# Altium PCB AT_Link_V1.4.PcbDoc
Units mil, origin at the board's own origin, x right, y up, seen from the top; angles counter-clockwise.
Board outline 2362.2 x 885.83 mil, 2 copper layers (Top Layer, Bottom Layer); 56 components, 66 nets, 234 pads, 83 vias.
Unrouted connection lines stored in the file: 35.
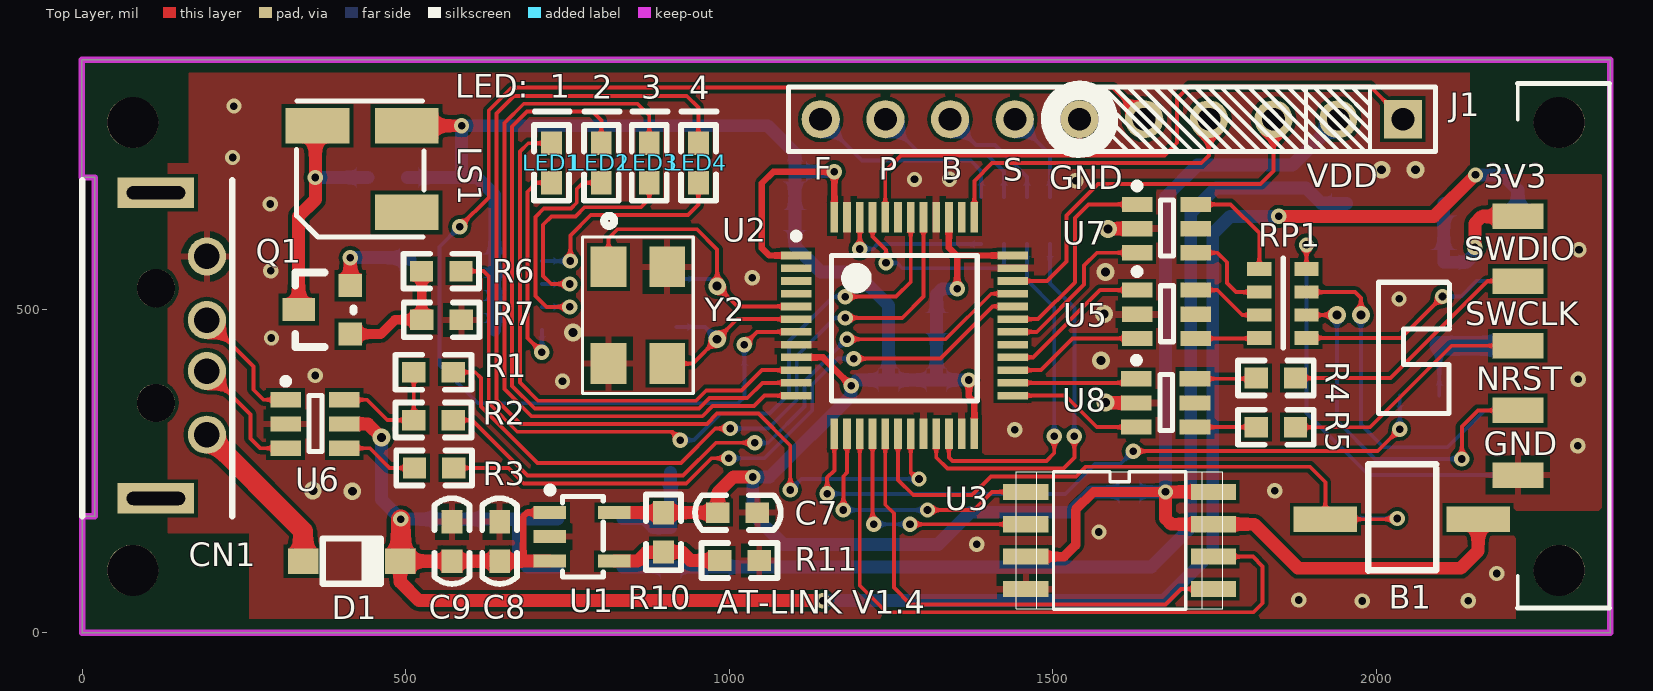
[diagram p0: Top Layer view]
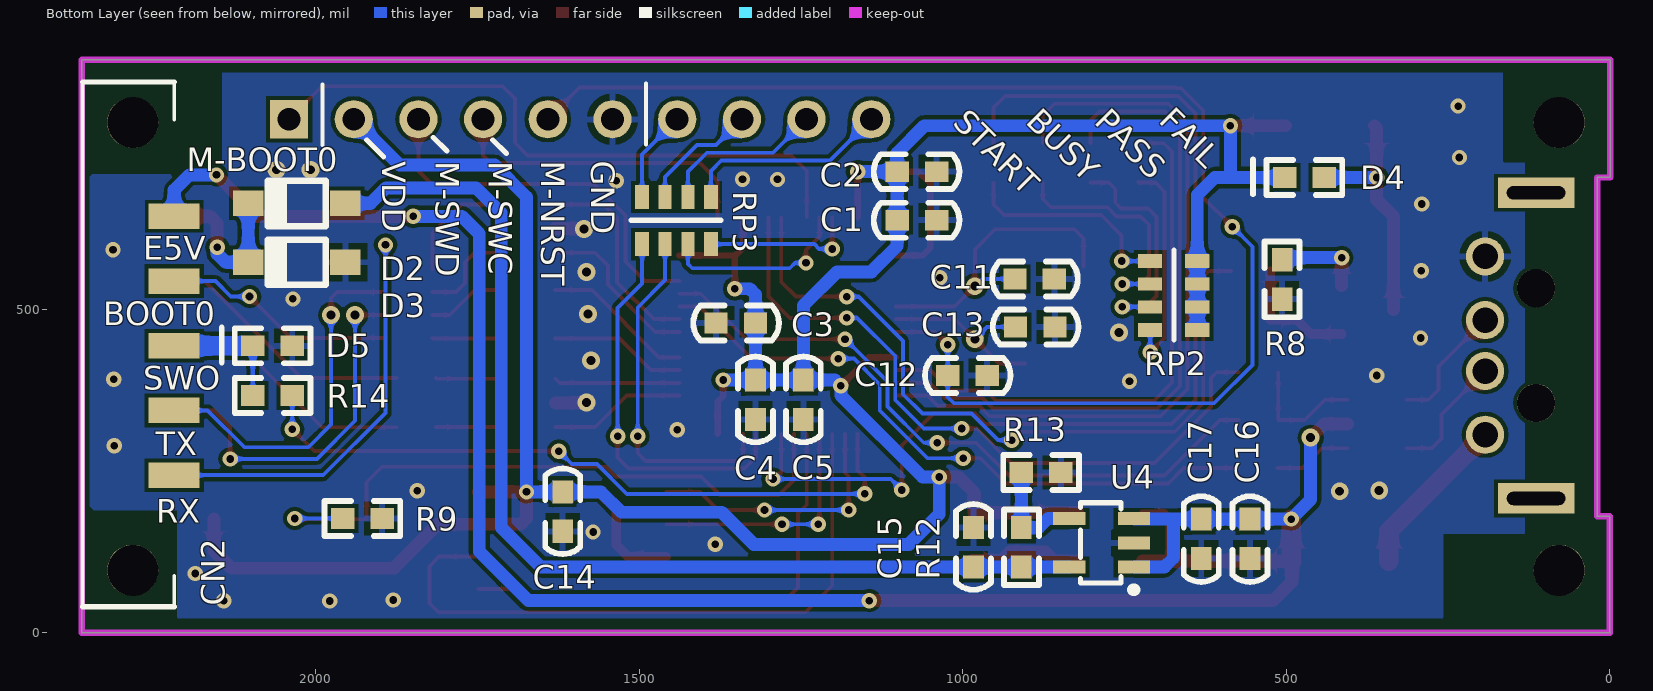
[diagram p1: Bottom Layer view, seen from below]

## Layer stack, top to bottom
Top Solder: solder mask 0.4, Solder Resist, Dk 3.5
Top Layer: signal copper 1.4
Dielectric1: dielectric 12.6, FR-4, Dk 4.8
Bottom Layer: signal copper 1.4
Bottom Solder: solder mask 0.4, Solder Resist, Dk 3.5

## Board outline
-0.32,703.68 -0.32,885.51 2361.89,885.51 2361.89,-0.31 -0.32,-0.31 0,0 0,180 19.37,180 19.37,703.68

## Design rules (kind name [scope] priority, off if disabled: settings)
Clearance [All] p1: gap=6 ignorepadtopadclearanceinfootprint=TRUE except(0: Arc-Hole Track-Hole SMDPad-Hole THPad-Hole Via-Hole Fill-Hole Poly-Hole Region-Hole Text-Hole)
PolygonConnect PolygonConnect_1 [IsVia] p1: connectstyle=Direct reliefconductorwidth=10 reliefentries=4 polygonreliefangle="90 Angle" airgapwidth=10
PolygonConnect [All] p2: connectstyle=Relief reliefconductorwidth=10 reliefentries=4 polygonreliefangle="90 Angle" airgapwidth=10
RoutingVias [All] p1: holewidth=28 width=50 viastyle="Through Hole" minholewidth=28 minwidth=50 maxholewidth=28 maxwidth=50
SolderMaskExpansion [All] p1: expansion=4
Width [All] p1: maxlimit=100 minlimit=6 preferedwidth=6
30 further rules are at their usual default settings.

## Components (designator, comment, footprint, x,y, rotation, side; value= is the part's Value field where it differs from the comment)
B1 "PB,Blue,SMD_2P" KEY_3*6*2.5 2157.89,175.51 r180 top locked
C1 "4.7uF" C0603 1040.72,637.89 r0 bottom value=4.7uf
C2 "0.1uF" C0603 1040.72,712.89 r0 bottom value=0.1uf
C3 "0.1uF" C0603 1381.65,478.48 r180 bottom value=0.1uf
C4 "0.1uF" C0603 1320.48,329.72 r90 bottom value=0.1uf
C5 "0.1uF" C0603 1246.48,329.72 r90 bottom value=0.1uf
C7 "10uF" C0603 982.72,185.48 r0 top
C8 "10uF" C0603 645.69,110.69 r90 top
C9 "0.1uF" C0603 571.89,110.72 r90 top
C11 "22pF/16V" C0603 919.69,546.68 r180 bottom
C12 "0.1uF/16V" C0603 1023.65,397.48 r180 bottom
C13 "22pF/16V" C0603 918.65,472.48 r180 bottom
C14 "0.1uF/16V" C0603 1618.48,156.72 r90 bottom value=0.1uf
C15 "10uF" C0603 983.48,101.72 r90 bottom
C16 "10uF" C0603 556.69,175.69 r270 bottom
C17 "0.1uF" C0603 631.89,175.69 r270 bottom
CN1 "USB-A 90°弯针" "USB_A - DIP" 192.89,581.67 r270 top
CN2 "CON1" SWD_2*5P_SMT 2219.15,443.6 r270 bottom locked
D1 "DFLS130L" SOD-123 416.68,110.69 r180 top
D2 "DFLS130L" SOD-123 2029.69,663.68 r180 bottom
D3 "SMF3.3A" SOD-123 2029.69,572.68 r180 bottom
D4 "1N5819" LED0603 441.72,703.89 r0 bottom
D5 "ESD3.3V52D" SOD523 2036.72,443.8 r0 bottom
J1 "Header 10" HDR1X10 2041.69,793.68 r180 top
LED1 "RED" LED0603 725.89,695.72 r90 top
LED2 "GREEN" LED0603 802.86,695.72 r90 top
LED3 "BLUE" LED0603 876.89,695.67 r90 top
LED4 "YELLOW" LED0603 952.89,695.67 r90 top
LS1 "MLT-5030贴片无源蜂鸣器" "BUZZER - 5030" 501.69,783.68 r90 top
Q1 "S8050" SOT-23 414.83,461.57 r90 top
R1 "NC" R0603 573.65,402.89 r180 top
R2 "22R" R0603 512.72,328.48 r0 top
R3 "22R" R0603 513.72,254.48 r0 top
R4 "100R" R0603 1875.65,393.89 r180 top
R5 "100R" R0603 1875.65,317.89 r180 top
R6 "470R" R0603 524.69,558.68 r0 top
R7 "100K" R0603 586.17,483.89 r180 top
R8 "22R" R0603 506.48,515.72 r90 bottom
R9 "100K" R0603 1897.72,176.89 r0 bottom
R10 "47K" R0603 898.89,124.72 r90 top
R11 "15K" R0603 1046.65,111.89 r180 top
R12 "51K" R0603 909.89,162.65 r270 bottom
R13 "15K" R0603 848.72,247.89 r0 bottom
R14 "100R" R0603 2097.65,366.48 r180 bottom
RP1 "100R" RP_4-0603 1819.69,561.98 r0 top
RP2 "1K" RP_4-0603 710.69,574.55 r180 bottom
RP3 "100R" RP_4-0603 1495.98,600.68 r90 bottom
U1 "RT9080N-08GJ5" SOT-23-5 787.69,85.69 r0 top
U2 "AT32F403CGT6" "LQFP48 - 2" 1103.69,583.13 r0 top locked
U3 "W25Q128" SOIC8_208 1603.69,142.69 r270 top
U4 "RT9080N-08GJ5" SOT-23-5 800.69,201.69 r0 bottom
U5 "USBLC6-2SC6" "SOT23_6P - L" 1630.69,529.68 r0 top
U6 "USBLC6-2SC6" "SOT23_6P - L" 314.68,360.09 r0 top
U7 "USBLC6-2SC6" "SOT23_6P - L" 1630.69,662.09 r0 top
U8 "USBLC6-2SC6" "SOT23_6P - L" 1629.69,392.69 r0 top
Y2 "8MHz" XTAL_5032 813.69,565.68 r270 top

## Footprints (in the part's own frame and the unit in brackets; to place one, negate y for a bottom-side part, rotate by r counter-clockwise, add the part's x,y. Pads: shape width x height; smd on the part's side, far side on the other; paste and mask are expansions set on the pad)
"BUZZER - 5030" [mm]
  rect 1.4x2.5 smd: 1(0,0) 2(0,3.5) 3(-3.4,0)
  silkscreen extent -4.37,-0.69 0.97,4.32
C0603 [mil]
  rect 36x32 smd: 1(-0.04,0.2) 2(60.96,0.2)
  silkscreen extent -35,-27 97,27
HDR1X10 [mm] "Connector; Header; 10 Position"
  rect 1.5x1.5 hole 0.9: 1(0,0)
  round 1.5 hole 0.9: 2(2.54,0) 3(5.08,0) 4(7.62,0) 5(10.16,0) 6(12.7,0) 7(15.24,0) 8(17.78,0) 9(20.32,0) 10(22.86,0)
  silkscreen extent -1.27,-1.27 24.13,1.27
KEY_3*6*2.5 [mm]
  rect 2.5x1 smd: 1(0,0) 2(6,0)
  silkscreen extent 1.65,-2.16 4.32,2.03
LED0603 [mil]
  rect 36x32 smd: 1(-0.04,0.2) 2(60.96,0.2)
  silkscreen extent -28,-28 110,27
"LQFP48 - 2" [mm] "DPIN-0.5"
  rect 1.2x0.3 smd: 1(0,0) 2(0,-0.5) 3(0,-1) 4(0,-1.5) 5(0,-2) 6(0,-2.5) 7(0,-3) 8(0,-3.5) 9(0,-4) 10(0,-4.5) 11(0,-5) 12(0,-5.5) 25(8.5,-5.5) 26(8.5,-5) 27(8.5,-4.5) 28(8.5,-4) 29(8.5,-3.5) 30(8.5,-3) 31(8.5,-2.5) 32(8.5,-2) 33(8.5,-1.5) 34(8.5,-1) 35(8.5,-0.5) 36(8.5,0)
  rect 0.3x1.2 smd: 13(1.5,-7) 14(2,-7) 15(2.5,-7) 16(3,-7) 17(3.5,-7) 18(4,-7) 19(4.5,-7) 20(5,-7) 21(5.5,-7) 22(6,-7) 23(6.5,-7) 24(7,-7) 37(7,1.5) 38(6.5,1.5) 39(6,1.5) 40(5.5,1.5) 41(5,1.5) 42(4.5,1.5) 43(4,1.5) 44(3.5,1.5) 45(3,1.5) 46(2.5,1.5) 47(2,1.5) 48(1.5,1.5)
  silkscreen extent -0.12,-5.71 7.11,0.89
R0603 [mil]
  rect 36x32 smd: 1(-0.04,0.2) 2(60.96,0.2)
  silkscreen extent -28,-27 89,27
RP_4-0603 [mm]
  rect 0.95x0.55 smd: 1(0,0) 4(0,-2.7) 5(1.85,-2.7) 8(1.85,0)
  rect 0.95x0.5 smd: 2(0,-0.9) 3(0,-1.8) 6(1.85,-1.8) 7(1.85,-0.9)
  silkscreen extent 0.94,-3.1 0.94,0.43
SOD523 [mil]
  rect 36x32 smd: 1(-0.04,0.2) 2(60.96,0.2)
  silkscreen extent -28,-28 109,27
SOD-123 [mm]
  rect 1.2x1 smd: 1(1.905,0) 2(-1.905,0)
  silkscreen extent -1.14,-0.89 1.14,0.89
SOIC8_208 [mil]
  rect 25x70 smd mask+2: 1(-75,-145) 2(-25,-145) 3(25,-145) 4(75,-145) 5(75,145) 6(25,145) 7(-25,145) 8(-75,145)
  silkscreen extent -106,-159 106,159
"SOT23_6P - L" [mm]
  rect 1.2x0.6 smd: 1(0,0) 2(0,-0.95) 3(0,-1.9) 4(2.3,-1.9) 5(2.3,-0.95) 6(2.3,0)
  silkscreen extent -0.12,-2.03 1.42,0.85
SOT-23 [mil]
  rect 36x36 smd: 1(0.11,0.15) 2(75.11,0.15)
  rect 36x50 smd: 3(38.11,80.15)
  silkscreen extent -20,-5 95,85
SOT-23-5 [mil]
  rect 50x20 smd: 1(-65,100) 2(-65,63) 3(-65,25) 4(35,25) 5(35,100)
  silkscreen extent -65,1 18,135
SWD_2*5P_SMT [mm]
  rect 1x2 smd: 1(-5.08,0) 3(-2.54,0) 5(0,0) 7(2.54,0) 9(5.08,0)
  rect 1x2 smd far side: 2(-5.08,0) 4(-2.54,0) 6(0,0) 8(2.54,0) 10(5.08,0)
  silkscreen extent -10.35,-3.6 10.25,0
"USB_A - DIP" [mm]
  round 1.5 hole 1: 1(7,0) 2(4.5,0) 3(2.5,0) 4(0,0)
  rect 1.2x3 hole 0.52 slot 2.3 at 90 deg: 5(-2.5,-2) 6(9.5,-2)
  round 1.5 hole 1.5: 7(1.25,-2) 8(5.75,-2)
  silkscreen extent -3,-4.9 10.2,1
XTAL_5032 [mm]
  rect 1.6x1.4 smd: 1(0,0) 2(3.8,0) 3(3.8,2.3) 4(0,2.3)
  silkscreen extent -2,-1.02 4.98,3.33

## Part data
B1: library part Push_Bottom,Blue,SMD_2P, "3*6*5"
C1 C2 C3 C4 C5 C14: library part "Cap Semi", "Capacitor (Semiconductor SIM Model)", LatestRevisionDate=29-May-2009, LatestRevisionNote="IPC-7351 Footprint Added.", PackageDescription="Chip Capacitor", PackageReference=C1206, Published=8-Jun-2000, Publisher="Altium Limited"
C7 C8 C9 C12 C15 C16 C17: library part 0.1uF,50V,20%,SMD0603
C11 C13: library part 10pF,50V,5%,SMD0603
CN1: library part "Header 4", "Header, 4-Pin", LatestRevisionDate=17-Jul-2002, LatestRevisionNote="Re-released for DXP Platform.", Publisher="Altium Limited"
CN2: library part CON10A_0
D1 D2 D3 D4 D5: library part Diode, "Default Diode", Code_JEDEC=DO-214-AB, LatestRevisionDate=17-Jul-2002, LatestRevisionNote="Re-released for DXP Platform.", PackageDescription="DO-214-AB/SMC; 2 C-Bend Leads; Body 7.9 x 5.9 mm, inc. leads (LxW)", PackageReference=SMC, PackageVersion=Sep-1996, Published=8-Jun-2000, Publisher="Altium Limited"
J1: "Header, 10-Pin", LatestRevisionDate=17-Jul-2002, LatestRevisionNote="Re-released for DXP Platform.", Publisher="Altium Limited"
LED1: library part RED,SMD0603
LED2: library part GREEN,SMD0603
LED3: library part BLUE,SMD0603, "贴片LED 蓝色 0603"
LED4: library part YELLOW,SMD0603
LS1: library part Bell, "Electrical Bell", LatestRevisionDate=17-Jul-2002, LatestRevisionNote="Re-released for DXP Platform.", PackageReference=PIN2, Published=24-Mar-1999, Publisher="Altium Limited"
Q1: library part NPN
R1: library part 10K,1/10W,1%,SMD0603_Dup1
R2 R3 R4 R5 R14: library part 22,1/10W,1%,SMD0603
R6 R7 R8 R10 R11 R12 R13: library part 470,1/10W,1%,SMD0603
R9: library part 10K,1/10W,1%,SMD0603
RP1 RP2 RP3: library part 22,1/16W,5%,8P4R
U1 U4: library part RT9080N
U2: library part LQFP48&QFN48
U3: library part W25Q128FVSIQ,SOIC8_1
Y2: library part "SMD-5032_4P  8MHZ 20PF 10PPM", "贴片晶振", Package=SMD-3225_4P, SuppliersPartNumber=C9002, ComponentLink1Description=¹©Ó, ComponentLink1URL=http://www.szlcsc.com/product/details_9522.html, Supplier=LC

## Free pads (board coordinates)
  round 78.74 hole 78.74: 0(78.43,96.54) 0(78.43,788.66) 0(2283.15,96.54) 0(2283.15,788.66)

## Via types
v1: diameter 23.62, hole 11.81, Top Layer to Bottom Layer, tented both sides, 68 vias
v2: diameter 27.56, hole 13.78, Top Layer to Bottom Layer, tented both sides, 15 vias

## Nets (pads, with @x,y where several pads share a name; then routed paths per layer and width w, separated by ;. In a path a pad name is that pad's centre, name@x,y a point inside that pad or via, vN(x,y) a via of type N, cw(c..) or ccw(c..) an arc to the next point about the centre after c; other vN are vias at no path point)
A-ATLK_SWO: R14.2 U2.13 | length 1075.9
  Top Layer w6: v1(1151.69,214.69) 1151.69,239.69 1162.74,250.74 U2.13 ; v1(1624.69,280.69) 2002.69,280.69 v1(2036.69,314.69)
  Bottom Layer w6: v1(1151.69,214.69) 1519.69,214.69 1565.69,260.69 1604.69,260.69 v1(1624.69,280.69) ; v1(2036.69,314.69) R14.2
ATLK_BOOT0: U2.27 U5.3 | length 212.6
  Top Layer w6: U2.27 1481.97,405.97 1530.88,454.88 U5.3
ATLK_NRST: U2.28 U5.1 | length 235.4
  Top Layer w6: U2.28 1469.65,425.65 1573.69,529.68 U5.1
ATLK_RX: U2.31 U7.1 | length 324.1
  Top Layer w6: U2.31 1477.71,484.71 1534.69,541.68 1534.69,641.2 1555.57,662.09 U7.1
ATLK_SWCLK: U2.25 U8.3 | length 211.5
  Top Layer w6: U2.25 1519.69,366.6 1568.4,317.88 U8.3
ATLK_SWDIO: U2.26 U8.1 | length 194
  Top Layer w6: U2.26 1623.28,386.28 U8.1
ATLK_TX: U2.30 U7.3 | length 260.3
  Top Layer w6: U2.30 1475.57,465.02 1548.69,538.13 1548.69,567.61 1568.36,587.28 U7.3
BOOT0: J1.1 U2.44 | length 987
  Top Layer w6: U2.44 1241.48,713.48 1265.88,737.88 1673.19,737.88 1692.69,757.38 1692.69,825.68 1711.69,844.68 1990.69,844.68 J1.1
BUSY: J1.8 RP3.7 | length 186.9
  Bottom Layer w6: J1.8 1381.48,753.89 1411.34,753.89 1460.55,704.68 RP3.7
BUZZ: R6.2 U2.42 | length 1167.4
  Top Layer w6: R6.2 620.48,558.89 628.69,550.68 628.69,354.71 672.71,310.69 911.69,310.69 v1(924.69,297.69) ; v1(1179.69,519.54) 1258.09,519.54 1280.85,542.3 U2.42
  Bottom Layer w6: v1(924.69,297.69) 945.69,297.69 986.69,338.69 1062.69,338.69 1092.69,368.69 1092.69,450.69 1161.54,519.54 v1(1179.69,519.54)
DM: CN1.2 U6.3 | length 192.9
  Top Layer w6: CN1.2 260.18,337.21 260.18,300.19 275.09,285.28 U6.3
DP: CN1.3 U6.1 | length 193.8
  Top Layer w6: CN1.3 264.68,411.45 264.68,375.69 280.28,360.09 U6.1
E5V: C8.1 C9.1 C16.1 C17.1 CN2.1 D1.2 U1.1 U1.3 U4.1 U4.3 U6.5 | length 3365.7
  Top Layer w10: 681.69,110.69 681.69,179.69 687.69,185.69 U1.1
  Top Layer w20: U6.5 441.68,322.69 v2(462.68,301.69) ; U1.3 681.69,110.69 C9.1 D1.2 491.69,78.69 520.69,49.69 v1(1144.69,49.69) ; v1(1849.7,643.67) 2089.67,643.67 v1(2153.69,707.68)
  Top Layer w30: D1.2 492.69,111.69 v1(492.69,175.69)
  Bottom Layer w20: v2(462.68,301.69) 462.68,205.69 v1(492.69,175.69) 631.65,175.69 C17.1 674.69,175.72 ; U4.1 688.69,101.69 674.69,115.69 674.69,175.72 ; U4.3 734.72,175.72 674.69,175.72 ; v1(1144.69,49.69) 1671.69,49.69 1747.69,125.69 1747.69,616.68 1774.67,643.67 v1(1849.7,643.67) ; v1(2153.69,707.68) 2195.69,707.68 2219.15,684.22 CN2.1
FAIL: J1.10 RP3.5 | length 321.4
  Bottom Layer w6: J1.10 1205.48,729.89 1373.69,729.89 1389.69,713.89 RP3.5
FLASH_CS: U2.14 U3.1 | length 413.8
  Top Layer w6: v1(1176.69,189.69) 1176.69,241.94 1182.43,247.69 U2.14 ; v1(1306.69,189.69) 1378.69,189.69 1406.69,217.69 U3.1
  Bottom Layer w6: v1(1176.69,189.69) v1(1306.69,189.69)
GND: C1.1 C2.1 C3.1 C4.1 C5.1 C7.2 C8.2 C9.2 C11.2 C12.2 C13.2 C14.1 C15.2 C16.2 C17.2 CN1.4 CN2.10 D3.1 D5.1 J1.6 R7.1 R8.1 R9.1 R11.1 R13.1 U1.2 U2.8 U2.20 U2.23 U2.35 U2.40 U2.47 U3.4 U4.2 U5.2 U6.2 U7.2 U8.2 Y2.2 Y2.4 | length 93.3
  Top Layer w20: v2(1581.69,355.69) 1582.09,355.28 U8.2 ; v2(1585.69,624.33) 1586.04,624.68 U7.2
  other v1: 1978.69,49.19 2142.69,49.69 1880.69,50.69 2186.69,91.69 1382.69,136.69 1571.69,155.69 1843.69,219.69 2311.69,289.07 1441.69,313.69 742.69,388.69 2312.69,391.69 360.5,397.69 292.68,455.69 2035.69,516.02 1035.69,548.84 291.68,559.38 2313.69,591.99 290.68,662.68 1535.74,698.84 1286.69,700.73 1340.69,700.88 232.68,734.68 234.68,814.06
  other v2: 417.68,218.69 356.68,219.69 1574.69,420.84 758.69,463.99 1579.69,492.61 1581.69,557.8 2008.69,715.68 2060.86,715.68
KEY1: B1.2 R9.2 U2.18 | length 1012.4
  Top Layer w6: U2.18 1261.17,236.26 1284.74,212.69 1375.69,212.69 1404.69,241.69 1536.69,241.69 1551.69,256.69 1897.67,256.69 1921.67,232.69 B1.2 2031.51,175.51 v1(2032.69,176.69)
  Bottom Layer w6: R9.2 v1(2032.69,176.69)
LED1: LED1.2 U2.10 | length 869.6
  Top Layer w6: LED1.2 689.69,756.68 676.69,743.68 676.69,386.63 704.63,358.69 948.74,358.69 964.74,374.69 1019.4,374.69 1050.69,405.97 U2.10
LED2: LED2.2 U2.11 | length 1059.2
  Top Layer w6: LED2.2 802.66,791.71 788.69,805.68 687.66,805.68 664.69,782.71 664.69,381.66 699.66,346.69 953.71,346.69 969.71,362.69 1028.09,362.69 1051.69,386.28 U2.11
LED3: LED3.2 U2.12 | length 1179.6
  Top Layer w6: LED3.2 876.69,799.68 858.69,817.68 682.69,817.68 652.69,787.68 652.69,376.69 694.69,334.69 958.69,334.69 974.69,350.69 1038.77,350.69 1054.69,366.6 U2.12
LED4: LED4.2 U2.19 | length 1676.8
  Top Layer w6: LED4.2 952.69,811.68 934.69,829.68 667.69,829.68 640.69,802.68 640.69,359.69 677.69,322.69 965.69,322.69 981.69,338.69 1045.69,338.69 1094.69,289.69 v1(1094.69,220.69) ; U2.19 1280.85,247.78 1290.94,237.69 v1(1293.69,237.69)
  Bottom Layer w6: v1(1094.69,220.69) 1111.69,237.69 v1(1293.69,237.69)
NetC11_1: C11.1 U2.5 Y2.1 | length 489.2
  Top Layer w6: Y2.1 813.69,609.68 827.69,623.68 950.69,623.68 981.69,592.68 v2(981.69,535.68) 1012.98,504.39 U2.5
  Bottom Layer w6: C11.1 970.48,546.89 v2(981.69,535.68)
NetC13_1: C13.1 U2.6 Y2.3 | length 298.7
  Top Layer w6: Y2.3 944.08,416.08 v2(981.69,453.69) 1012.71,484.71 U2.6
  Bottom Layer w6: C13.1 962.69,472.69 v2(981.69,453.69)
NetD4_1: D4.1 LS1.2 Q1.3 | length 377.3
  Top Layer w20: Q1.3 334.68,643.68 360.5,669.5 v1(360.5,703.68) 360.5,780.29 LS1.2
  Bottom Layer w20: v1(360.5,703.68) D4.1
NetLED1_1: LED1.1 RP2.4 | length 337.2
  Top Layer w6: v1(710.69,433.69) 688.69,455.69 688.69,681.68 702.69,695.68 LED1.1 ; LED1.1@726.69,694.68 LED1.1@728.63,696.63
  Bottom Layer w6: v1(710.69,433.69) RP2.4
NetLED2_1: LED2.1 RP2.3 | length 361.3
  Top Layer w6: v1(753.69,503.69) 717.69,503.69 700.69,520.68 700.69,642.77 713.6,655.68 755.69,655.68 764.69,664.68 764.69,685.68 774.69,695.68 LED2.1
  Bottom Layer w6: RP2.3 v1(753.69,503.69)
NetLED3_1: LED3.1 RP2.2 | length 373.7
  Top Layer w6: v1(753.69,539.12) 725.25,539.12 712.69,551.68 712.69,630.68 725.69,643.68 762.69,643.68 776.69,657.68 863.69,657.68 876.69,670.68 LED3.1
  Bottom Layer w6: RP2.2 v1(753.69,539.12)
NetLED4_1: LED4.1 RP2.1 | length 335.3
  Top Layer w6: v1(754.69,574.55) 754.69,614.19 786.18,645.68 936.69,645.68 952.69,661.68 LED4.1
  Bottom Layer w6: RP2.1 v1(754.69,574.55)
NetQ1_1: Q1.1 R6.1 R7.2 | length 195.1
  Top Layer w15: Q1.1 461.68,461.69 483.69,483.69 R7.2 525.21,558.32 R6.1
NetQ1_2: Q1.2 R8.2 | length 136.4
  Top Layer w20: Q1.2 v1(414.68,579.82)
  Bottom Layer w20: v1(414.68,579.82) 503.55,579.82 R8.2
NetR1_2: R1.2 R2.1 U6.6 | length 194.5
  Top Layer w6: U6.6 440.28,360.09 471.68,328.69 R2.1 R1.2
NetR3_1: R3.1 U6.4 | length 121.1
  Top Layer w6: U6.4 444.61,285.28 475.2,254.69 R3.1
NetR4_2: R4.2 U8.6 | length 94.9
  Top Layer w6: U8.6 1813.69,392.69 R4.2
NetR5_2: R5.2 U8.4 | length 94.5
  Top Layer w6: U8.4 1814.49,317.88 R5.2
NetR10_1: R10.1 R11.2 U1.4 | length 174.2
  Top Layer w20: U1.4 858.69,110.69 872.69,124.69 R10.1 927.69,124.69 940.69,111.69 R11.2
NetR12_1: R12.1 R13.2 U4.4 | length 164.8
  Bottom Layer w20: U4.4 868.69,176.69 882.69,162.69 R12.1 R13.2
NetRP1_1: RP1.1 U7.6 | length 172.5
  Top Layer w6: U7.6 1775.28,662.09 1819.69,617.68 RP1.1
NetRP1_2: RP1.2 U7.4 | length 142.4
  Top Layer w6: U7.4 1755.09,587.28 1769.69,572.68 1769.69,540.68 1783.82,526.55 RP1.2
NetRP1_3: RP1.3 U5.6 | length 114.4
  Top Layer w6: U5.6 1754.69,529.68 1793.25,491.12 RP1.3
NetRP1_4: RP1.4 U5.4 | length 98.8
  Top Layer w6: U5.4 1818.88,454.88 RP1.4
NRST: C12.1 J1.5 U2.7 | length 2141.6
  Top Layer w6: v1(583.69,627.68) 628.69,672.68 628.69,807.66 662.71,841.68 670.69,841.68 671.69,842.68 1592.69,842.68 J1.5 ; v1(1023.69,445.34) 1043.37,465.02 U2.7
  Bottom Layer w6: v1(583.69,627.68) 552.69,596.68 552.69,413.74 611.74,354.69 1013.69,354.69 1023.69,364.69 C12.1 v1(1023.69,445.34)
PASS: J1.9 RP3.6 | length 256.1
  Bottom Layer w6: J1.9 1293.48,741.89 1395.91,741.89 1425.12,712.68 RP3.6
PB8: RP3.3 U2.45 | length 298.3
  Top Layer w6: U2.45 1221.8,612.57 1242.69,591.68 v1(1242.69,571.68)
  Bottom Layer w6: v1(1242.69,571.68) 1259.45,571.68 1267.69,563.45 1418.45,563.45 1425.12,570.12 RP3.3
PB9: RP3.4 U2.46 | length 239.6
  Top Layer w6: v1(1202.11,593.26) U2.46
  Bottom Layer w6: v1(1202.11,593.26) 1222.26,593.26 1229.69,600.68 RP3.4
PB10: RP3.1 U2.21 | length 609.8
  Top Layer w6: U2.21 1320.22,271.15 1337.69,253.69 1516.69,253.69 1533.69,270.69 v1(1533.69,303.69)
  Bottom Layer w6: RP3.1 1495.98,539.54 1533.69,501.84 v1(1533.69,303.69)
PB11: RP3.2 U2.22 | length 547
  Top Layer w6: U2.22 1339.91,270.98 1345.2,265.69 1490.69,265.69 1502.69,277.69 v1(1502.69,303.69)
  Bottom Layer w6: RP3.2 1460.55,545.05 1502.69,502.91 v1(1502.69,303.69)
SPI_MISO: U2.16 U3.2 | length 375.6
  Top Layer w6: U2.16 1221.8,169.57 v1(1223.69,167.69) ; v1(1279.69,167.69) U3.2
  Bottom Layer w6: v1(1223.69,167.69) v1(1279.69,167.69)
SPI_MOSI: U2.17 U3.5 | length 758
  Top Layer w6: U2.17 1241.48,197.89 1254.69,184.69 1254.69,69.69 1280.69,43.69 1674.69,43.69 1698.69,67.69 U3.5
SPI_SCK: U2.15 U3.6 | length 1019.1
  Top Layer w6: U2.15 1202.11,73.26 1243.69,31.69 1810.69,31.69 1824.69,45.69 1824.69,102.69 1809.69,117.69 U3.6
START: J1.7 RP3.8 | length 142.7
  Bottom Layer w6: J1.7 1495.98,739.39 RP3.8
SWCLK: J1.4 U2.37 | length 490.9
  Top Layer w6: U2.37 1379.28,698.47 1406.69,725.88 1729.88,725.88 1741.69,737.68 J1.4
SWDIO: J1.3 U2.34 | length 595.6
  Top Layer w6: U2.34 1491.76,543.76 1521.69,573.68 1521.69,645.17 1570.2,693.68 1821.69,693.68 1841.69,713.68 J1.3
T-ATLK_BOOT0: CN2.3 RP1.5 | length 363
  Top Layer w6: RP1.5 2038.69,455.69 v1(2102.69,519.68)
  Bottom Layer w6: v1(2102.69,519.68) 2131.69,519.68 2155.6,543.6 CN2.3
T-ATLK_NRST: CN2.8 RP1.6 | length 574.8
  Top Layer w6: RP1.6 v2(1939.69,491.12) ; v1(2132.69,268.69) 2132.69,318.69 2157.6,343.6 CN2.8
  Bottom Layer w6: v2(1939.69,491.12) 1939.69,327.69 1998.69,268.69 v1(2132.69,268.69)
T-ATLK_RX: CN2.9 RP1.8 | length 671.4
  Top Layer w6: RP1.8 v1(1892.52,599.52)
  Bottom Layer w6: v1(1892.52,599.52) 1892.52,339.85 1988.77,243.6 CN2.9 CN2.9@2219.15,235.87
T-ATLK_SWCLK: CN2.6 R5.1 | length 395.6
  Top Layer w6: R5.1 1990.69,317.69 2116.6,443.6 CN2.6
T-ATLK_SWDIO: CN2.4 R4.1 | length 405.6
  Top Layer w6: R4.1 2022.69,393.69 2172.6,543.6 CN2.4
T-ATLK_SWO: CN2.5 D5.2 R14.1 | length 198.4
  Bottom Layer w6: R14.1 D5.2
  Bottom Layer w30: D5.2 CN2.5
T-ATLK_TX: CN2.7 RP1.7 | length 564.4
  Top Layer w6: RP1.7 1967.82,526.55 1976.69,517.68 v2(1976.69,491.12)
  Bottom Layer w6: v2(1976.69,491.12) 1976.69,321.69 2011.69,286.69 2110.69,286.69 2167.6,343.6 CN2.7
T_VCC: CN2.2 D2.2 D3.2 | length 262.4
  Top Layer w20: v1(2152.69,595.68) 2152.69,632.68 2163.6,643.6 CN2.2
  Bottom Layer w20: D2.2 D3.2 2139.69,572.68 2152.69,585.68 v1(2152.69,595.68)
USB_DM: R3.2 U2.32 | length 1010.2
  Top Layer w6: R3.2 658.89,254.69 682.69,230.89 933.89,230.89 972.69,269.69 v1(999.69,269.69) ; v1(1192.69,423.69) 1326.69,423.69 1407.39,504.39 U2.32
  Bottom Layer w6: v1(999.69,269.69) 1054.69,269.69 1128.69,343.69 1128.69,383.69 1168.69,423.69 v1(1192.69,423.69)
USB_DP: R2.2 U2.33 | length 1039.5
  Top Layer w6: R2.2 602.69,328.69 688.48,242.89 928.92,242.89 979.71,293.69 v1(1039.69,293.69) ; v1(1182.43,453.69) 1334.86,453.69 1405.26,524.08 U2.33
  Bottom Layer w6: v1(1039.69,293.69) 1060.69,293.69 1116.69,349.69 1116.69,388.66 1181.71,453.69 v1(1182.43,453.69)
USB_UP_POWER: R1.1 U2.41 | length 1079.5
  Top Layer w6: R1.1 607.69,402.69 616.69,393.69 616.69,349.74 703.74,262.69 925.69,262.69 978.69,315.69 v1(1001.69,315.69) ; v1(1179.69,486.69) 1267.69,486.69 1300.54,519.54 U2.41
  Bottom Layer w6: v1(1001.69,315.69) 1060.69,315.69 1104.69,359.69 1104.69,427.69 1163.69,486.69 v1(1179.69,486.69)
VBUS: CN1.1 D1.1 | length 257
  Top Layer w30: CN1.1 341.68,157.28 D1.1
VCC: B1.1 C1.2 C2.2 C3.2 C4.2 C5.2 C7.1 C14.2 D4.2 J1.2 LS1.1 R10.2 RP2.5 RP2.6 RP2.7 RP2.8 U1.5 U2.1 U2.9 U2.24 U2.36 U2.39 U2.48 U3.3 U3.7 U3.8 | length 5622.3
  Top Layer w10: U2.9 1145.69,425.65 1145.69,424.69 v1(1188.69,381.69) ; U2.1 1062.24,583.13 1050.69,594.68 1050.69,694.68 1068.69,712.68 v1(1162.69,712.68) 1162.74,712.63 U2.48 ; U2.39 1339.91,595 1351.78,583.13 1352.69,583.13 ; v1(1352.69,531.68) 1352.69,583.13 ; v1(1370.69,390.69) 1370.69,365.6 1379.28,357.01 U2.24 ; U2.36 1352.69,583.13
  Top Layer w15: U3.3 1517.66,117.69 1535.74,135.76 1535.74,190.17 1563.26,217.69 v1(1674.69,217.69)
  Top Layer w20: LS1.1 v1(586.61,783.68) ; U1.5 R10.2 C7.1 982.69,216.69 1006.69,240.69 v1(1036.69,240.69) ; U3.8 v1(1674.69,217.69) 1674.69,176.51 1683.51,167.69 U3.7 1811.69,167.69 1879.69,99.69 2130.89,99.69 2157.89,126.69 B1.1
  Bottom Layer w20: D4.2 610.85,703.68 637.85,676.68 RP2.8 RP2.7 RP2.6 RP2.5 ; 586.61,704.68 v1(586.61,783.68) 1059.69,783.68 1101.69,741.68 C2.2 ; v1(1162.69,712.68) C2.2 ; v1(1352.69,531.68) 1329.69,531.68 1320.69,522.68 C3.2 C4.2 ; v1(1370.69,390.69) C4.2 ; J1.2 1870.69,722.68 1723.69,722.68 1674.69,673.68 v1(1674.69,217.69) C14.2 1559.36,217.69 1527.93,186.26 1372.95,186.26 1323.38,136.69 1083.69,136.69 1036.69,183.69 v1(1036.69,240.69) 1062.69,240.69 1188.69,366.69 v1(1188.69,381.69) 1197.69,390.69 C5.2 ; C2.2 C1.2 1101.69,597.68 1141.54,557.83 1194.54,557.83 1246.69,505.69 C5.2 ; C5.2 C4.2
VCC3.5V: C15.1 D2.1 R12.2 U4.5 | length 1656.4
  Bottom Layer w20: U4.5 R12.2 C15.1 1652.69,101.69 1713.69,162.69 1713.69,648.68 1752.69,687.68 1891.69,687.68 1915.69,663.68 D2.1
pads on no net: CN1.5 CN1.6 CN1.7 CN1.8 LS1.3 U2.2 U2.3 U2.4 U2.29 U2.38 U2.43 U5.5 U7.5 U8.5

## Polygon pours and split planes (outlines as drawn)
GND on Top Layer "Top Layer-GND" (solid, remove dead copper, pour order 10): 132.68,725.68 132.68,154.69 131.68,153.69 257.68,153.69 258.68,152.69 258.68,21.69 2215.69,21.69 2215.69,187.69 2216.69,188.69 2347.69,188.69 2348.69,189.69 2348.69,707.68 2347.69,708.68 2146.69,708.68 2144.69,706.68 2144.69,865.68 165.68,865.68 164.68,864.68 164.68,726.68 165.68,725.68
GND on Bottom Layer "Bottom Layer-GND" (solid, remove dead copper, pour order 12): 131.68,726.68 131.68,153.69 132.68,152.69 256.68,152.69 257.68,151.69 257.68,23.69 258.68,22.69 2213.69,22.69 2214.69,23.69 2214.69,188.69 2215.69,189.69 2343.69,189.69 2349.69,195.69 2349.69,704.68 2345.69,708.68 2145.69,708.68 2144.69,709.68 2144.69,865.68 165.68,865.68 165.68,728.68 163.68,726.68

## Keep-outs
Keep-Out Layer:
  lines w10: 19,180 0,180 0,0 0.32,-0.31 2361.89,-0.31 2361.89,885.51 -0.32,885.51 -0.32,703.68 19.37,703.68 19.37,180.37

## Silkscreen, mask and mechanical layers (free items; w line width, h text height)
Top Overlay:
  lines w6: 1577.69,843.68 1591.69,829.68 1676.69,744.68 ; 1594.69,765.68 1615.69,744.68 ; 1595.69,843.68 1695.69,743.68 ; 1599.69,780.68 1636.69,743.68 ; 1600.69,800.68 1657.69,743.68 ; 1616.69,843.68 1716.69,743.68 ; 1636.69,843.68 1736.69,743.68 ; 1657.69,843.68 1756.69,744.68 ; 1678.69,842.68 1776.69,744.68 ; 1699.69,842.68 1798.69,743.68 ; 1721.69,842.68 1820.69,743.68 ; 1741.69,842.68 1839.74,744.63 ; 1761.69,841.68 1859.69,743.68 ; 1781.69,842.68 1880.69,743.68 ; 1803.69,842.68 1890.69,755.68 1902.69,743.68 ; 1823.69,842.68 1893.69,772.68 1922.69,743.68 ; 1842.69,843.68 1892.69,793.68 1942.69,743.68 ; 1863.69,843.68 1892.69,814.68 ; 1885.69,841.68 1982.69,744.68 ; 1891.69,744.68 1891.69,843.68 ; 1891.69,815.68 1963.69,743.68 ; 1905.69,841.68 1989.69,757.68 ; 1923.69,843.68 1990.69,776.68 ; 1944.69,841.68 1990.69,795.68 ; 1962.69,843.68 1990.69,815.68 ; 1990.69,744.68 1990.69,844.68 ; 2360.88,38.09 2360.88,849.11
  lines w8: 2110.69,541.68 2003.69,541.68 2003.69,338.69 2112.69,338.69 2112.69,414.69 2042.69,414.69 2042.69,469.69 2113.69,469.69 ; 2113.69,473.69 2113.69,538.68
  lines w30: 1585.04,804.52 ccw(c1541.69,793.68) 1585.62,801.86
  text "LED:" at 576.69,826.68 h36
  text "1" at 722.69,826.68 h36
  text "2" at 788.69,825.68 h36
  text "3" at 864.69,825.68 h36
  text "4" at 938.69,824.68 h36
  text "F" at 1130.69,688.68 h60
  text "P" at 1231.69,688.68 h60
  text "B" at 1327.69,688.68 h60
  text "VDD" at 1892.69,688.68 h36
  text "3V3" at 2166.69,687.68 h36
  text "S" at 1423.69,686.68 h60
  text "GND" at 1494.69,685.68 h36
  text "SWDIO" at 2136.69,575.68 h36
  text "SWCLK" at 2137.69,475.69 h36
  text "NRST" at 2154.69,374.69 h36
  text "GND" at 2166.69,274.69 h36
  text "AT-LINK V1.4" at 980.69,29.69 h36
Bottom Overlay:
  lines w6: 1489.69,754.68 1489.69,848.68 ; 1989.69,753.68 1989.69,847.68
  lines w8: 1705.69,740.68 1726.69,761.68 ; 1797.69,744.68 1818.69,765.68 ; 1895.69,735.68 1921.69,761.68
  text "FAIL" at 698.69,789.68 h36 r45
  text "PASS" at 798.69,788.68 h36 r45
  text "BUSY" at 904.69,788.68 h36 r45
  text "START" at 1017.69,787.06 h36 r45
  text "GND" at 1574.69,729.68 h36 r90
  text "M-NRST" at 1651.69,729.68 h36 r90
  text "M-SWC" at 1732.69,728.68 h36 r90
  text "M-SWD" at 1814.69,728.68 h36 r90
  text "VDD" at 1897.69,728.68 h36 r90
  text "M-BOOT0" at 2199.69,713.68 h36
  text "E5V" at 2266.69,576.68 h36
  text "BOOT0" at 2328.69,475.69 h36
  text "SWO" at 2266.69,375.69 h36
  text "TX" at 2247.69,274.69 h36
  text "RX" at 2246.69,169.69 h36
Drill Drawing:
  text "'.Legend'" at 295.68,-60.31 h36